# Altium PCB KUOZHAN.PCBDOC (part 18 of 21)
Units mm, origin at the board's own origin, x right, y up, seen from the top; angles counter-clockwise.
Board outline 165.51 x 116.38 mm, 2 copper layers (Top Layer, Bottom Layer); 171 components, 245 nets, 894 pads, 298 vias.
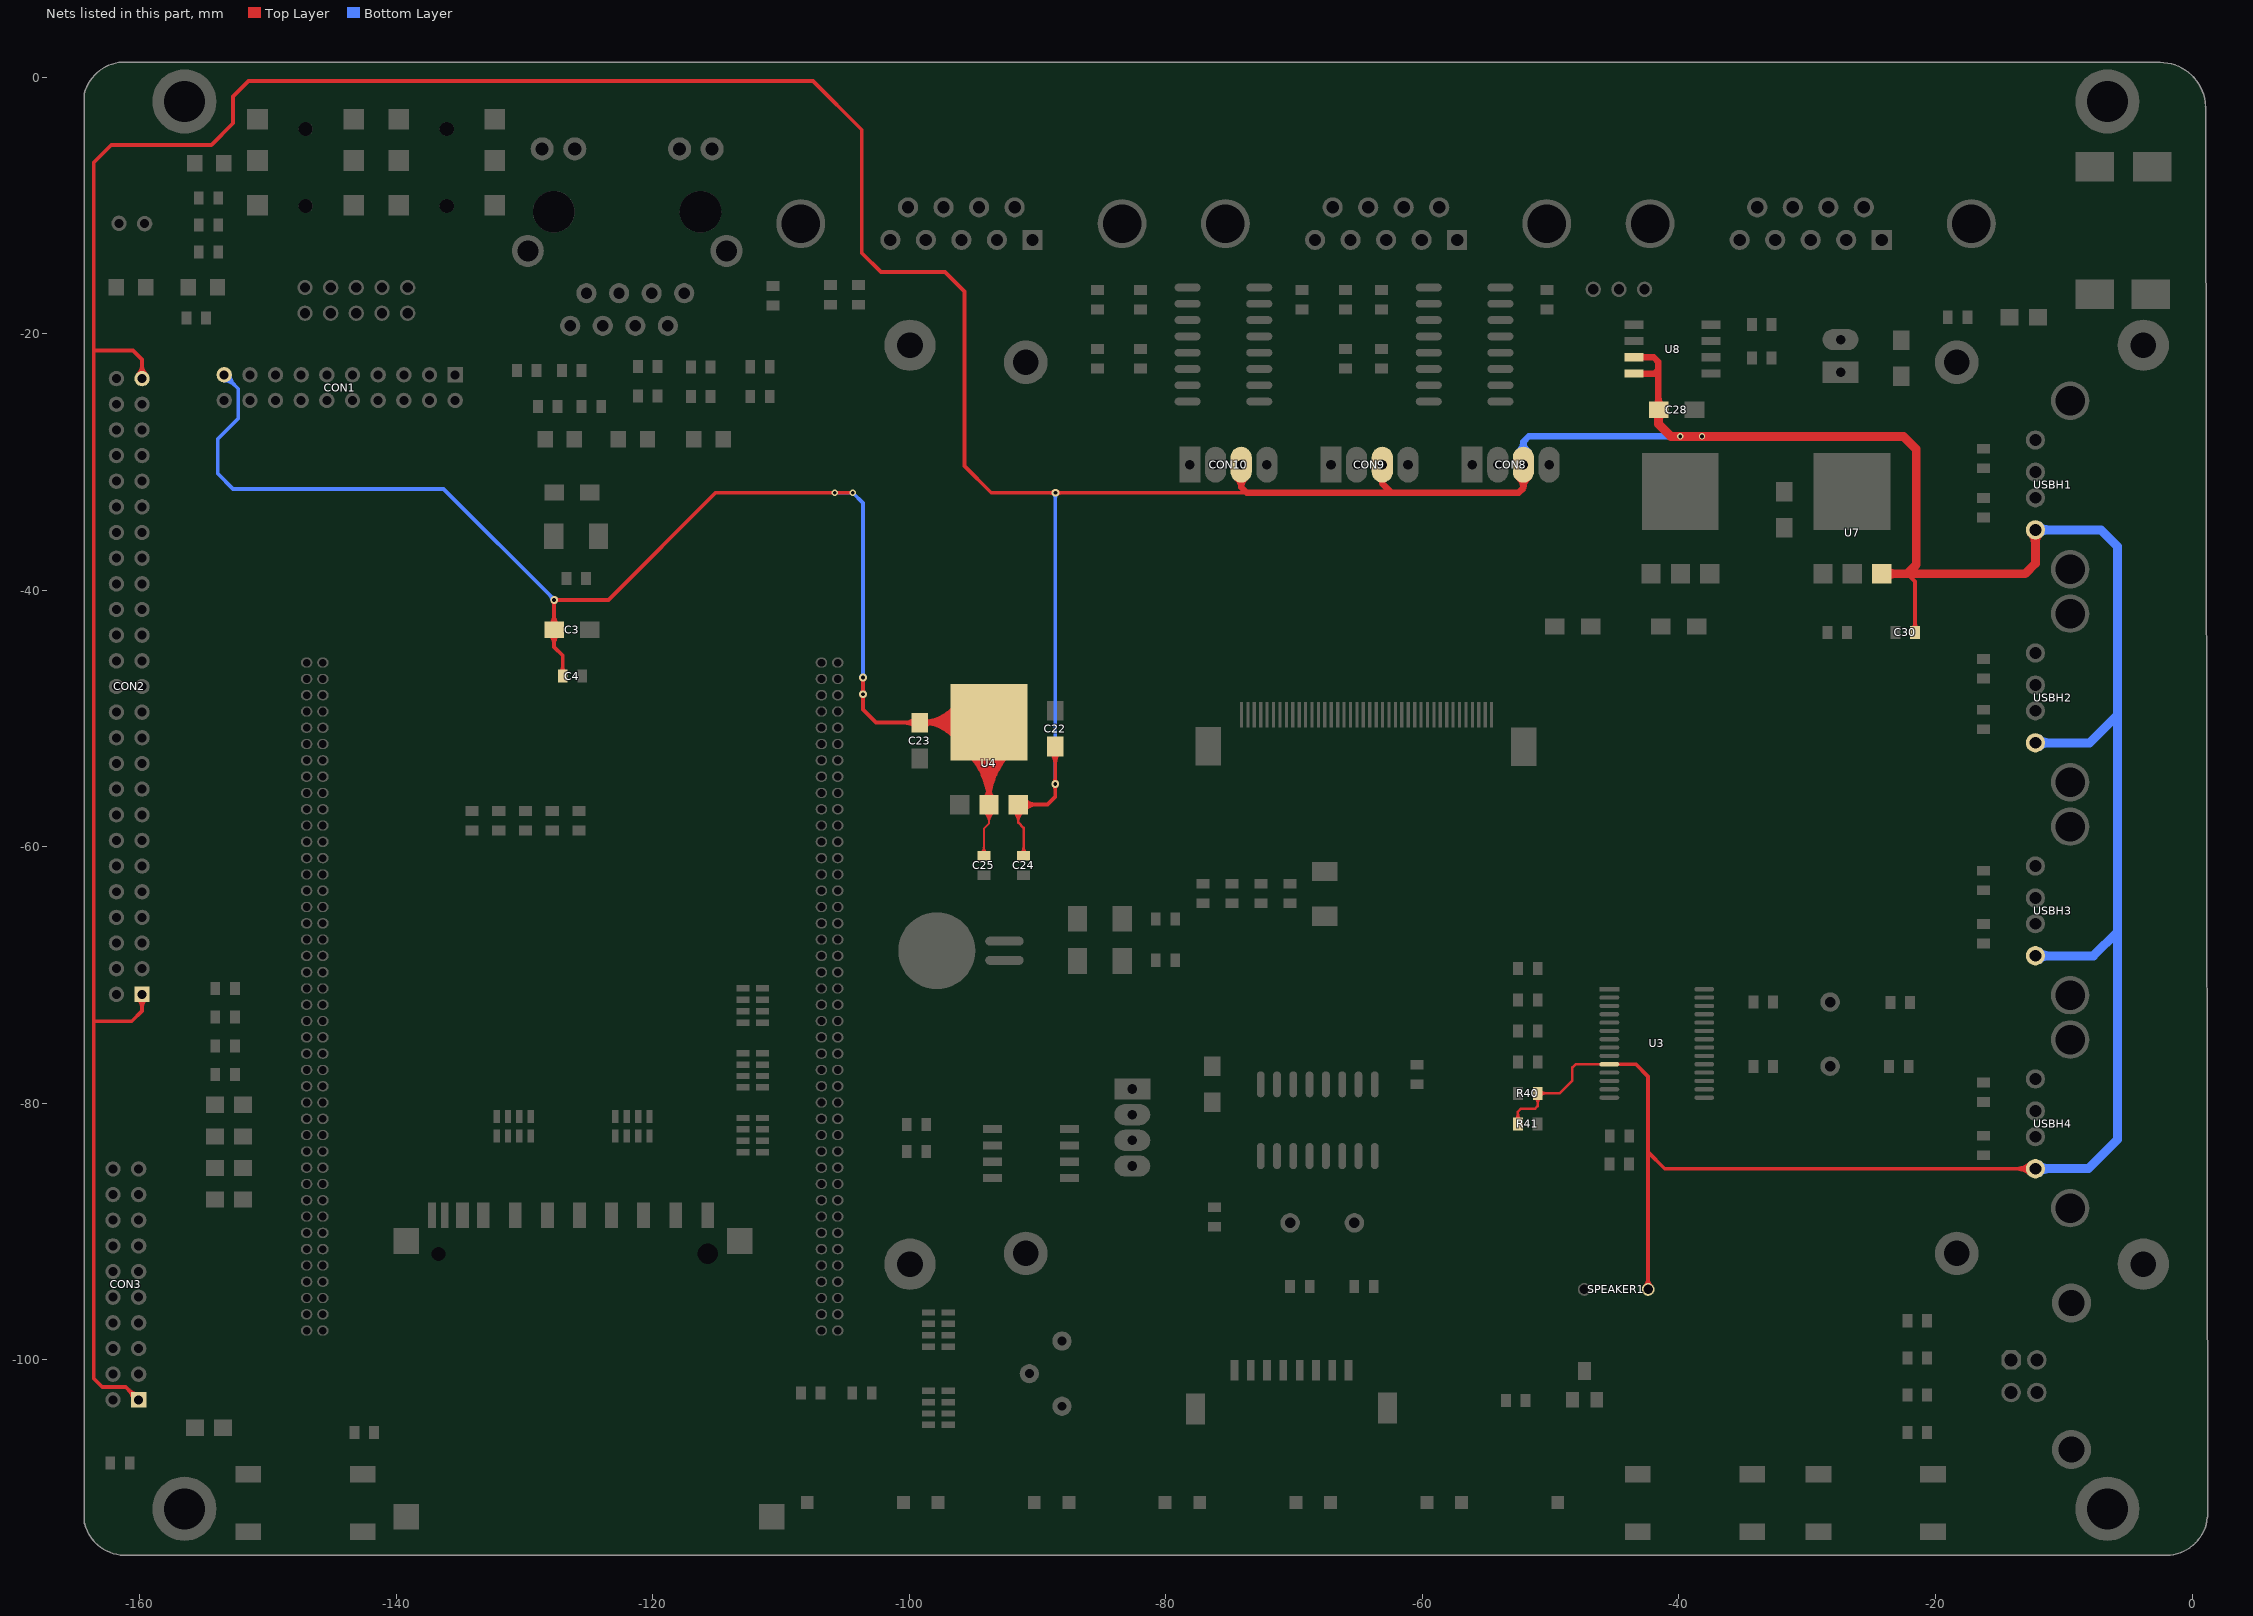
[diagram p18: the nets of this part, all layers, seen from the top]

## Via types
v1: diameter 0.5, hole 0.3, Top Layer to Bottom Layer, 272 vias
v2: diameter 0.6, hole 0.3, Top Layer to Bottom Layer, 24 vias
v3: diameter 0.9, hole 0.9, Top Layer to Bottom Layer, 2 vias

## Nets (pads, with @x,y where several pads share a name; then routed paths per layer and width w, separated by ;. In a path a pad name is that pad's centre, name@x,y a point inside that pad or via, vN(x,y) a via of type N, cw(c..) or ccw(c..) an arc to the next point about the centre after c; other vN are vias at no path point) (continued)
VDD5V: C22.1 C24.1 C28.1 C30.1 CON2.1 CON2.49 CON3.1 CON8.3 CON9.3 CON10.3 R40.2 R41.2 SPEAKER1.1 U3.10 U4.1 U7.1 U8.7 U8.8 USBH1.1 USBH2.1 USBH3.1 USBH4.1 | length 710.3
  Top Layer w0.2: U4.1@-91.497,-56.712 -91.497,-58.103 ; C24.1@-91.083,-60.69 -91.083,-58.517 -91.497,-58.103 ; R41.2@-52.549,-81.6 -52.549,-80.649 -52.3,-80.4 -51.2,-80.4 -51.013,-80.213 R40.2@-51.013,-79.212 -49.312,-79.212 -48.3,-78.2 -48.3,-77.2 -48.05,-76.95 U3.10@-45.35,-76.95 ; U4.1@-91.914,-57.211 cw(c-92.66,-58.103) -91.497,-58.103 ; U4.1@-91.914,-57.211 cw(c-92.66,-58.103) -91.497,-58.103 ; U4.1@-91.914,-57.211 cw(c-92.66,-58.103) -91.497,-58.103 ; U4.1@-91.914,-57.211 cw(c-92.66,-58.103) -91.497,-58.103 ; U4.1@-91.914,-57.211 cw(c-92.66,-58.103) -91.497,-58.103 ; U4.1@-91.786,-57.057 cw(c-92.302,-57.675) -91.497,-57.675 ; U4.1@-91.786,-57.057 cw(c-92.302,-57.675) -91.497,-57.675 ; U4.1@-91.786,-57.057 cw(c-92.302,-57.675) -91.497,-57.675 ; U4.1@-91.786,-57.057 cw(c-92.302,-57.675) -91.497,-57.675 ; U4.1@-91.786,-57.057 cw(c-92.302,-57.675) -91.497,-57.675 ; -91.497,-58.103 cw(c-90.333,-58.103) U4.1@-91.08,-57.211 ; -91.497,-58.103 cw(c-90.333,-58.103) U4.1@-91.08,-57.211 ; -91.497,-58.103 cw(c-90.333,-58.103) U4.1@-91.08,-57.211 ; -91.497,-58.103 cw(c-90.333,-58.103) U4.1@-91.08,-57.211 ; -91.497,-58.103 cw(c-90.333,-58.103) U4.1@-91.08,-57.211 ; -91.497,-57.675 cw(c-90.691,-57.675) U4.1@-91.208,-57.057 ; -91.497,-57.675 cw(c-90.691,-57.675) U4.1@-91.208,-57.057 ; -91.497,-57.675 cw(c-90.691,-57.675) U4.1@-91.208,-57.057 ; -91.497,-57.675 cw(c-90.691,-57.675) U4.1@-91.208,-57.057 ; -91.497,-57.675 cw(c-90.691,-57.675) U4.1@-91.208,-57.057 ; C24.1@-91.282,-60.491 ccw(c-91.762,-60.012) -91.083,-60.012 ; C24.1@-91.282,-60.491 ccw(c-91.762,-60.012) -91.083,-60.012 ; C24.1@-91.282,-60.491 ccw(c-91.762,-60.012) -91.083,-60.012 ; C24.1@-91.282,-60.491 ccw(c-91.762,-60.012) -91.083,-60.012 ; C24.1@-91.282,-60.491 ccw(c-91.762,-60.012) -91.083,-60.012 ; -91.083,-60.012 ccw(c-90.405,-60.012) C24.1@-90.885,-60.491 ; -91.083,-60.012 ccw(c-90.405,-60.012) C24.1@-90.885,-60.491 ; -91.083,-60.012 ccw(c-90.405,-60.012) C24.1@-90.885,-60.491 ; -91.083,-60.012 ccw(c-90.405,-60.012) C24.1@-90.885,-60.491 ; -91.083,-60.012 ccw(c-90.405,-60.012) C24.1@-90.885,-60.491 ; R41.2@-52.748,-81.274 ccw(c-53.228,-80.795) -52.549,-80.795 ; R41.2@-52.748,-81.274 ccw(c-53.228,-80.795) -52.549,-80.795 ; R41.2@-52.748,-81.274 ccw(c-53.228,-80.795) -52.549,-80.795 ; R41.2@-52.748,-81.274 ccw(c-53.228,-80.795) -52.549,-80.795 ; R41.2@-52.748,-81.274 ccw(c-53.228,-80.795) -52.549,-80.795 ; -52.549,-80.795 ccw(c-51.871,-80.795) R41.2@-52.351,-81.274 ; -52.549,-80.795 ccw(c-51.871,-80.795) R41.2@-52.351,-81.274 ; -52.549,-80.795 ccw(c-51.871,-80.795) R41.2@-52.351,-81.274 ; -52.549,-80.795 ccw(c-51.871,-80.795) R41.2@-52.351,-81.274 ; -52.549,-80.795 ccw(c-51.871,-80.795) R41.2@-52.351,-81.274 ; R40.2@-51.211,-79.538 cw(c-51.691,-80.018) -51.013,-80.018 ; R40.2@-51.211,-79.538 cw(c-51.691,-80.018) -51.013,-80.018 ; R40.2@-51.211,-79.538 cw(c-51.691,-80.018) -51.013,-80.018 ; R40.2@-51.211,-79.538 cw(c-51.691,-80.018) -51.013,-80.018 ; R40.2@-51.211,-79.538 cw(c-51.691,-80.018) -51.013,-80.018 ; -51.013,-80.018 cw(c-50.334,-80.018) R40.2@-50.814,-79.538 ; -51.013,-80.018 cw(c-50.334,-80.018) R40.2@-50.814,-79.538 ; -51.013,-80.018 cw(c-50.334,-80.018) R40.2@-50.814,-79.538 ; -51.013,-80.018 cw(c-50.334,-80.018) R40.2@-50.814,-79.538 ; -51.013,-80.018 cw(c-50.334,-80.018) R40.2@-50.814,-79.538 ; R40.2@-50.814,-79.411 cw(c-50.334,-79.891) -50.334,-79.212 ; R40.2@-50.814,-79.411 cw(c-50.334,-79.891) -50.334,-79.212 ; R40.2@-50.814,-79.411 cw(c-50.334,-79.891) -50.334,-79.212 ; R40.2@-50.814,-79.411 cw(c-50.334,-79.891) -50.334,-79.212 ; R40.2@-50.814,-79.411 cw(c-50.334,-79.891) -50.334,-79.212 ; R40.2@-50.814,-79.013 ccw(c-50.334,-78.534) -50.334,-79.212 ; R40.2@-50.814,-79.013 ccw(c-50.334,-78.534) -50.334,-79.212 ; R40.2@-50.814,-79.013 ccw(c-50.334,-78.534) -50.334,-79.212 ; R40.2@-50.814,-79.013 ccw(c-50.334,-78.534) -50.334,-79.212 ; R40.2@-50.814,-79.013 ccw(c-50.334,-78.534) -50.334,-79.212
  Top Layer w0.3: CON2.1@-160.118,-71.818 cw(c-160.886,-72.586) -159.8,-72.586 cw(c-158.714,-72.586) CON2.1@-159.482,-71.818 ; CON2.49@-160.118,-23.182 ccw(c-160.886,-22.414) -159.8,-22.414 ccw(c-158.714,-22.414) CON2.49@-159.482,-23.182 ; CON3.1@-160.067,-103.106 -161.074,-102.1 -162.9,-102.1 -163.567,-101.433 -163.567,-73.6 ; CON2.1@-159.8,-71.5 -159.8,-72.8 -160.6,-73.6 -163.567,-73.6 ; CON2.49@-159.8,-23.5 -159.8,-22 -160.5,-21.3 -163.567,-21.3 ; U4.1@-91.497,-56.712 -89.212,-56.712 -88.621,-56.121 v2(-88.621,-55.1) C22.1@-88.621,-52.18 ; -73.7,-32.4 v2(-88.6,-32.4) -93.6,-32.4 -95.7,-30.3 -95.7,-16.7 -97.2,-15.2 -102.2,-15.2 -103.7,-13.7 -103.7,-4.1 -107.5,-0.3 -151.5,-0.3 -152.7,-1.5 -152.7,-3.6 -154.4,-5.3 -162.2,-5.3 -163.567,-6.667 -163.567,-21.3 ; U3.10@-45.35,-76.95 -43.35,-76.95 -42.4,-77.9 -42.4,-83.8 ; SPEAKER1.1@-42.4,-94.5 -42.4,-83.8 ; -22.212,-38.712 -21.6,-39.324 C30.1@-21.6,-43.5 ; USBH4.1@-12.213,-85.091 -41.109,-85.091 -42.4,-83.8 ; -163.567,-73.6 -163.567,-21.3 ; -160.836,-102.338 cw(c-161.604,-103.106) CON3.1@-160.517,-103.106 ; -160.836,-102.338 ccw(c-160.067,-101.57) CON3.1@-160.067,-102.656 ; -160.836,-102.338 cw(c-161.604,-103.106) CON3.1@-160.517,-103.106 ; -160.836,-102.338 ccw(c-160.067,-101.57) CON3.1@-160.067,-102.656 ; -160.836,-102.338 cw(c-161.604,-103.106) CON3.1@-160.517,-103.106 ; -160.836,-102.338 ccw(c-160.067,-101.57) CON3.1@-160.067,-102.656 ; -160.836,-102.338 cw(c-161.604,-103.106) CON3.1@-160.517,-103.106 ; -160.836,-102.338 ccw(c-160.067,-101.57) CON3.1@-160.067,-102.656 ; -160.836,-102.338 ccw(c-160.067,-101.57) CON3.1@-160.067,-102.656 ; -160.836,-102.338 cw(c-161.604,-103.106) CON3.1@-160.517,-103.106 ; U4.1@-91.073,-57.136 cw(c-90.048,-58.161) -90.048,-56.712 ; U4.1@-91.073,-57.136 cw(c-90.048,-58.161) -90.048,-56.712 ; U4.1@-91.073,-57.136 cw(c-90.048,-58.161) -90.048,-56.712 ; U4.1@-91.073,-57.136 cw(c-90.048,-58.161) -90.048,-56.712 ; U4.1@-91.073,-57.136 cw(c-90.048,-58.161) -90.048,-56.712 ; U4.1@-91.073,-56.288 ccw(c-90.048,-55.263) -90.048,-56.712 ; U4.1@-91.073,-56.288 ccw(c-90.048,-55.263) -90.048,-56.712 ; U4.1@-91.073,-56.288 ccw(c-90.048,-55.263) -90.048,-56.712 ; U4.1@-91.073,-56.288 ccw(c-90.048,-55.263) -90.048,-56.712 ; U4.1@-91.073,-56.288 ccw(c-90.048,-55.263) -90.048,-56.712 ; C22.1@-88.964,-52.65 cw(c-89.792,-53.478) -88.621,-53.478 ; C22.1@-88.964,-52.65 cw(c-89.792,-53.478) -88.621,-53.478 ; C22.1@-88.964,-52.65 cw(c-89.792,-53.478) -88.621,-53.478 ; C22.1@-88.964,-52.65 cw(c-89.792,-53.478) -88.621,-53.478 ; C22.1@-88.964,-52.65 cw(c-89.792,-53.478) -88.621,-53.478 ; -88.962,-32.4 cw(c-88.962,-32.762) v2@-88.706,-32.506 ; -88.962,-32.4 ccw(c-88.962,-32.038) v2@-88.706,-32.294 ; -88.962,-32.4 cw(c-88.962,-32.762) v2@-88.706,-32.506 ; -88.962,-32.4 ccw(c-88.962,-32.038) v2@-88.706,-32.294 ; -88.962,-32.4 cw(c-88.962,-32.762) v2@-88.706,-32.506 ; -88.962,-32.4 ccw(c-88.962,-32.038) v2@-88.706,-32.294 ; -88.962,-32.4 cw(c-88.962,-32.762) v2@-88.706,-32.506 ; -88.962,-32.4 ccw(c-88.962,-32.038) v2@-88.706,-32.294 ; -88.962,-32.4 ccw(c-88.962,-32.038) v2@-88.706,-32.294 ; -88.962,-32.4 cw(c-88.962,-32.762) v2@-88.706,-32.506 ; v2@-88.727,-55.206 cw(c-88.983,-55.462) -88.621,-55.462 ; v2@-88.727,-55.206 cw(c-88.983,-55.462) -88.621,-55.462 ; v2@-88.727,-55.206 cw(c-88.983,-55.462) -88.621,-55.462 ; v2@-88.727,-55.206 cw(c-88.983,-55.462) -88.621,-55.462 ; v2@-88.727,-55.206 cw(c-88.983,-55.462) -88.621,-55.462 ; v2@-88.727,-54.994 ccw(c-88.983,-54.738) -88.621,-54.738 ; v2@-88.727,-54.994 ccw(c-88.983,-54.738) -88.621,-54.738 ; v2@-88.727,-54.994 ccw(c-88.983,-54.738) -88.621,-54.738 ; v2@-88.727,-54.994 ccw(c-88.983,-54.738) -88.621,-54.738 ; v2@-88.727,-54.994 ccw(c-88.983,-54.738) -88.621,-54.738 ; -88.621,-55.462 cw(c-88.259,-55.462) v2@-88.515,-55.206 ; -88.621,-55.462 cw(c-88.259,-55.462) v2@-88.515,-55.206 ; -88.621,-55.462 cw(c-88.259,-55.462) v2@-88.515,-55.206 ; -88.621,-55.462 cw(c-88.259,-55.462) v2@-88.515,-55.206 ; -88.621,-55.462 cw(c-88.259,-55.462) v2@-88.515,-55.206 ; -88.621,-54.738 ccw(c-88.259,-54.738) v2@-88.515,-54.994 ; -88.621,-54.738 ccw(c-88.259,-54.738) v2@-88.515,-54.994 ; -88.621,-54.738 ccw(c-88.259,-54.738) v2@-88.515,-54.994 ; -88.621,-54.738 ccw(c-88.259,-54.738) v2@-88.515,-54.994 ; -88.621,-54.738 ccw(c-88.259,-54.738) v2@-88.515,-54.994 ; -88.621,-53.478 cw(c-87.45,-53.478) C22.1@-88.278,-52.65 ; -88.621,-53.478 cw(c-87.45,-53.478) C22.1@-88.278,-52.65 ; -88.621,-53.478 cw(c-87.45,-53.478) C22.1@-88.278,-52.65 ; -88.621,-53.478 cw(c-87.45,-53.478) C22.1@-88.278,-52.65 ; -88.621,-53.478 cw(c-87.45,-53.478) C22.1@-88.278,-52.65 ; v2@-88.494,-32.506 cw(c-88.238,-32.762) -88.238,-32.4 ; v2@-88.494,-32.506 cw(c-88.238,-32.762) -88.238,-32.4 ; v2@-88.494,-32.506 cw(c-88.238,-32.762) -88.238,-32.4 ; v2@-88.494,-32.506 cw(c-88.238,-32.762) -88.238,-32.4 ; v2@-88.494,-32.506 cw(c-88.238,-32.762) -88.238,-32.4 ; v2@-88.494,-32.294 ccw(c-88.238,-32.038) -88.238,-32.4 ; v2@-88.494,-32.294 ccw(c-88.238,-32.038) -88.238,-32.4 ; v2@-88.494,-32.294 ccw(c-88.238,-32.038) -88.238,-32.4 ; v2@-88.494,-32.294 ccw(c-88.238,-32.038) -88.238,-32.4 ; v2@-88.494,-32.294 ccw(c-88.238,-32.038) -88.238,-32.4 ; SPEAKER1.1@-42.647,-94.253 ccw(c-43.245,-93.655) -42.4,-93.655 ; SPEAKER1.1@-42.647,-94.253 ccw(c-43.245,-93.655) -42.4,-93.655 ; SPEAKER1.1@-42.647,-94.253 ccw(c-43.245,-93.655) -42.4,-93.655 ; SPEAKER1.1@-42.647,-94.253 ccw(c-43.245,-93.655) -42.4,-93.655 ; SPEAKER1.1@-42.647,-94.253 ccw(c-43.245,-93.655) -42.4,-93.655 ; -42.4,-93.655 ccw(c-41.555,-93.655) SPEAKER1.1@-42.153,-94.253 ; -42.4,-93.655 ccw(c-41.555,-93.655) SPEAKER1.1@-42.153,-94.253 ; -42.4,-93.655 ccw(c-41.555,-93.655) SPEAKER1.1@-42.153,-94.253 ; -42.4,-93.655 ccw(c-41.555,-93.655) SPEAKER1.1@-42.153,-94.253 ; -42.4,-93.655 ccw(c-41.555,-93.655) SPEAKER1.1@-42.153,-94.253 ; C30.1@-21.753,-42.989 ccw(c-22.124,-42.618) -21.6,-42.618 ; C30.1@-21.753,-42.989 ccw(c-22.124,-42.618) -21.6,-42.618 ; C30.1@-21.753,-42.989 ccw(c-22.124,-42.618) -21.6,-42.618 ; C30.1@-21.753,-42.989 ccw(c-22.124,-42.618) -21.6,-42.618 ; C30.1@-21.753,-42.989 ccw(c-22.124,-42.618) -21.6,-42.618 ; -21.6,-42.571 ccw(c-21.009,-42.571) C30.1@-21.427,-42.989 ; -21.6,-42.571 ccw(c-21.009,-42.571) C30.1@-21.427,-42.989 ; -21.6,-42.571 ccw(c-21.009,-42.571) C30.1@-21.427,-42.989 ; -21.6,-42.571 ccw(c-21.009,-42.571) C30.1@-21.427,-42.989 ; -21.6,-42.571 ccw(c-21.009,-42.571) C30.1@-21.427,-42.989 ; -13.662,-85.091 cw(c-13.662,-86.54) USBH4.1@-12.638,-85.515 ; -13.662,-85.091 ccw(c-13.662,-83.643) USBH4.1@-12.638,-84.667 ; -13.662,-85.091 cw(c-13.662,-86.54) USBH4.1@-12.638,-85.515 ; -13.662,-85.091 ccw(c-13.662,-83.643) USBH4.1@-12.638,-84.667 ; -13.662,-85.091 cw(c-13.662,-86.54) USBH4.1@-12.638,-85.515 ; -13.662,-85.091 ccw(c-13.662,-83.643) USBH4.1@-12.638,-84.667 ; -13.662,-85.091 cw(c-13.662,-86.54) USBH4.1@-12.638,-85.515 ; -13.662,-85.091 ccw(c-13.662,-83.643) USBH4.1@-12.638,-84.667 ; -13.662,-85.091 ccw(c-13.662,-83.643) USBH4.1@-12.638,-84.667 ; -13.662,-85.091 cw(c-13.662,-86.54) USBH4.1@-12.638,-85.515
  Top Layer w0.5: CON10.3@-74.122,-30.21 -74.122,-31.978 ; CON9.3@-63.122,-30.21 -63.122,-31.678 -62.4,-32.4 ; CON8.3@-52.122,-30.21 -52.122,-32.022 ; U8.8@-43.498,-23.112 -41.912,-23.112 -41.6,-22.8 ; U8.7@-43.498,-21.842 -41.958,-21.842 -41.6,-22.2 -41.6,-22.8 ; C28.1@-41.6,-25.921 -41.6,-22.8 ; -22.212,-38.712 -20.112,-38.712 ; CON10.3@-74.48,-31.234 cw(c-75.073,-31.978) -74.122,-31.978 ; CON10.3@-74.48,-31.234 cw(c-75.073,-31.978) -74.122,-31.978 ; CON10.3@-74.48,-31.234 cw(c-75.073,-31.978) -74.122,-31.978 ; CON10.3@-74.48,-31.234 cw(c-75.073,-31.978) -74.122,-31.978 ; CON10.3@-74.48,-31.234 cw(c-75.073,-31.978) -74.122,-31.978 ; -74.122,-31.978 cw(c-73.171,-31.978) CON10.3@-73.763,-31.234 ; -74.122,-31.978 cw(c-73.171,-31.978) CON10.3@-73.763,-31.234 ; -74.122,-31.978 cw(c-73.171,-31.978) CON10.3@-73.763,-31.234 ; -74.122,-31.978 cw(c-73.171,-31.978) CON10.3@-73.763,-31.234 ; -74.122,-31.978 cw(c-73.171,-31.978) CON10.3@-73.763,-31.234 ; -74.122,-31.978 -73.7,-32.4 -62.4,-32.4 ; -62.4,-32.4 -52.5,-32.4 -52.122,-32.022 ; CON8.3@-52.493,-31.224 cw(c-53.165,-32.022) -52.122,-32.022 ; CON8.3@-52.493,-31.224 cw(c-53.165,-32.022) -52.122,-32.022 ; CON8.3@-52.493,-31.224 cw(c-53.165,-32.022) -52.122,-32.022 ; CON8.3@-52.493,-31.224 cw(c-53.165,-32.022) -52.122,-32.022 ; CON8.3@-52.493,-31.224 cw(c-53.165,-32.022) -52.122,-32.022 ; -52.122,-32.022 cw(c-51.079,-32.022) CON8.3@-51.751,-31.224 ; -52.122,-32.022 cw(c-51.079,-32.022) CON8.3@-51.751,-31.224 ; -52.122,-32.022 cw(c-51.079,-32.022) CON8.3@-51.751,-31.224 ; -52.122,-32.022 cw(c-51.079,-32.022) CON8.3@-51.751,-31.224 ; -52.122,-32.022 cw(c-51.079,-32.022) CON8.3@-51.751,-31.224 ; C28.1@-41.852,-26.193 cw(c-42.509,-26.85) -41.58,-26.85 ; C28.1@-41.852,-26.193 cw(c-42.509,-26.85) -41.58,-26.85 ; C28.1@-41.852,-26.193 cw(c-42.509,-26.85) -41.58,-26.85 ; C28.1@-41.852,-25.649 ccw(c-42.46,-25.041) -41.6,-25.041 ; C28.1@-41.852,-25.649 ccw(c-42.46,-25.041) -41.6,-25.041 ; C28.1@-41.852,-25.649 ccw(c-42.46,-25.041) -41.6,-25.041 ; C28.1@-41.852,-25.649 ccw(c-42.46,-25.041) -41.6,-25.041 ; C28.1@-41.852,-25.649 ccw(c-42.46,-25.041) -41.6,-25.041 ; -41.6,-24.942 ccw(c-40.601,-24.942) C28.1@-41.307,-25.649 ; -41.6,-24.942 ccw(c-40.601,-24.942) C28.1@-41.307,-25.649 ; -41.6,-24.942 ccw(c-40.601,-24.942) C28.1@-41.307,-25.649 ; -41.6,-24.942 ccw(c-40.601,-24.942) C28.1@-41.307,-25.649 ; -41.6,-24.942 ccw(c-40.601,-24.942) C28.1@-41.307,-25.649 ; -41.58,-26.85 cw(c-40.65,-26.85) C28.1@-41.307,-26.193 ; -41.58,-26.85 cw(c-40.65,-26.85) C28.1@-41.307,-26.193 ; -41.58,-26.85 cw(c-40.65,-26.85) C28.1@-41.307,-26.193 ; U7.1@-23.843,-39.066 cw(c-22.99,-39.919) -22.99,-38.712 ; U7.1@-23.843,-39.066 cw(c-22.99,-39.919) -22.99,-38.712 ; U7.1@-23.843,-39.066 cw(c-22.99,-39.919) -22.99,-38.712 ; U7.1@-23.843,-38.358 ccw(c-22.99,-37.505) -22.99,-38.712 ; U7.1@-23.843,-38.358 ccw(c-22.99,-37.505) -22.99,-38.712 ; U7.1@-23.843,-38.358 ccw(c-22.99,-37.505) -22.99,-38.712 ; USBH1.1@-12.567,-35.645 cw(c-13.421,-36.498) -12.213,-36.498 ; USBH1.1@-12.567,-35.645 cw(c-13.421,-36.498) -12.213,-36.498 ; USBH1.1@-12.567,-35.645 cw(c-13.421,-36.498) -12.213,-36.498 ; -12.213,-36.498 cw(c-11.006,-36.498) USBH1.1@-11.86,-35.645 ; -12.213,-36.498 cw(c-11.006,-36.498) USBH1.1@-11.86,-35.645 ; -12.213,-36.498 cw(c-11.006,-36.498) USBH1.1@-11.86,-35.645
  Top Layer w0.7: C28.1@-41.58,-25.921 -41.58,-27.041 -40.621,-28 v1(-39.9,-28) v1(-38.2,-28) -22.5,-28 -21.5,-29 -21.5,-38 -22.212,-38.712 ; U7.1@-24.197,-38.712 -22.212,-38.712 ; USBH1.1@-12.213,-35.291 -12.213,-37.913 -13.012,-38.712 -22.212,-38.712 ; -41.58,-26.609 cw(c-40.892,-26.609) -41.378,-26.122 ccw(c-40.892,-26.609) -41.58,-26.609 ; -41.58,-26.609 ccw(c-42.268,-26.609) -41.781,-26.122 cw(c-42.268,-26.609) -41.58,-26.609 ; -23.231,-38.712 cw(c-23.231,-37.746) -23.914,-38.429 ccw(c-23.231,-37.746) -23.231,-38.712 ; -23.231,-38.712 ccw(c-23.231,-39.678) -23.914,-38.995 cw(c-23.231,-39.678) -23.231,-38.712 ; -12.213,-36.257 cw(c-11.248,-36.257) -11.931,-35.574 ccw(c-11.248,-36.257) -12.213,-36.257 ; -12.213,-36.257 ccw(c-13.179,-36.257) -12.496,-35.574 cw(c-13.179,-36.257) -12.213,-36.257
  Bottom Layer w0.3: v2(-88.621,-55.1) v2@-88.621,-32.4 ; v2@-88.727,-54.994 ccw(c-88.983,-54.738) -88.621,-54.738 ; v2@-88.727,-54.994 ccw(c-88.983,-54.738) -88.621,-54.738 ; v2@-88.727,-54.994 ccw(c-88.983,-54.738) -88.621,-54.738 ; v2@-88.727,-54.994 ccw(c-88.983,-54.738) -88.621,-54.738 ; v2@-88.727,-54.994 ccw(c-88.983,-54.738) -88.621,-54.738 ; v2@-88.706,-32.506 cw(c-88.912,-32.712) -88.621,-32.712 ; v2@-88.706,-32.506 cw(c-88.912,-32.712) -88.621,-32.712 ; v2@-88.706,-32.506 cw(c-88.912,-32.712) -88.621,-32.712 ; v2@-88.706,-32.506 cw(c-88.912,-32.712) -88.621,-32.712 ; v2@-88.706,-32.506 cw(c-88.912,-32.712) -88.621,-32.712 ; -88.621,-54.738 ccw(c-88.259,-54.738) v2@-88.515,-54.994 ; -88.621,-54.738 ccw(c-88.259,-54.738) v2@-88.515,-54.994 ; -88.621,-54.738 ccw(c-88.259,-54.738) v2@-88.515,-54.994 ; -88.621,-54.738 ccw(c-88.259,-54.738) v2@-88.515,-54.994 ; -88.621,-54.738 ccw(c-88.259,-54.738) v2@-88.515,-54.994 ; -88.621,-32.813 cw(c-88.187,-32.813) v2@-88.494,-32.506 ; -88.621,-32.813 cw(c-88.187,-32.813) v2@-88.494,-32.506 ; -88.621,-32.813 cw(c-88.187,-32.813) v2@-88.494,-32.506 ; -88.621,-32.813 cw(c-88.187,-32.813) v2@-88.494,-32.506 ; -88.621,-32.813 cw(c-88.187,-32.813) v2@-88.494,-32.506
  Bottom Layer w0.5: CON8.3@-52.122,-30.21 -52.122,-28.422 ; v1(-38.2,-28) v1(-39.9,-28) -51.7,-28 -52.122,-28.422 ; CON8.3@-52.486,-29.189 ccw(c-53.113,-28.422) -52.122,-28.422 ; CON8.3@-52.486,-29.189 ccw(c-53.113,-28.422) -52.122,-28.422 ; CON8.3@-52.486,-29.189 ccw(c-53.113,-28.422) -52.122,-28.422 ; CON8.3@-52.486,-29.189 ccw(c-53.113,-28.422) -52.122,-28.422 ; CON8.3@-52.486,-29.189 ccw(c-53.113,-28.422) -52.122,-28.422 ; -52.122,-28.422 ccw(c-51.131,-28.422) CON8.3@-51.758,-29.189 ; -52.122,-28.422 ccw(c-51.131,-28.422) CON8.3@-51.758,-29.189 ; -52.122,-28.422 ccw(c-51.131,-28.422) CON8.3@-51.758,-29.189 ; -52.122,-28.422 ccw(c-51.131,-28.422) CON8.3@-51.758,-29.189 ; -52.122,-28.422 ccw(c-51.131,-28.422) CON8.3@-51.758,-29.189 ; USBH4.1@-11.86,-85.445 cw(c-11.006,-86.298) -11.006,-85.091 ; USBH4.1@-11.86,-85.445 cw(c-11.006,-86.298) -11.006,-85.091 ; USBH4.1@-11.86,-85.445 cw(c-11.006,-86.298) -11.006,-85.091 ; USBH4.1@-11.86,-84.738 ccw(c-11.006,-83.884) -11.006,-85.091 ; USBH4.1@-11.86,-84.738 ccw(c-11.006,-83.884) -11.006,-85.091 ; USBH4.1@-11.86,-84.738 ccw(c-11.006,-83.884) -11.006,-85.091 ; USBH3.1@-11.86,-68.845 cw(c-11.006,-69.698) -11.006,-68.491 ; USBH3.1@-11.86,-68.845 cw(c-11.006,-69.698) -11.006,-68.491 ; USBH3.1@-11.86,-68.845 cw(c-11.006,-69.698) -11.006,-68.491 ; USBH3.1@-11.86,-68.138 ccw(c-11.006,-67.284) -11.006,-68.491 ; USBH3.1@-11.86,-68.138 ccw(c-11.006,-67.284) -11.006,-68.491 ; USBH3.1@-11.86,-68.138 ccw(c-11.006,-67.284) -11.006,-68.491 ; USBH2.1@-11.86,-52.245 cw(c-11.006,-53.098) -11.006,-51.891 ; USBH2.1@-11.86,-52.245 cw(c-11.006,-53.098) -11.006,-51.891 ; USBH2.1@-11.86,-52.245 cw(c-11.006,-53.098) -11.006,-51.891 ; USBH2.1@-11.86,-51.538 ccw(c-11.006,-50.684) -11.006,-51.891 ; USBH2.1@-11.86,-51.538 ccw(c-11.006,-50.684) -11.006,-51.891 ; USBH2.1@-11.86,-51.538 ccw(c-11.006,-50.684) -11.006,-51.891 ; USBH1.1@-11.86,-35.645 cw(c-11.006,-36.498) -11.006,-35.291 ; USBH1.1@-11.86,-35.645 cw(c-11.006,-36.498) -11.006,-35.291 ; USBH1.1@-11.86,-35.645 cw(c-11.006,-36.498) -11.006,-35.291 ; USBH1.1@-11.86,-34.938 ccw(c-11.006,-34.084) -11.006,-35.291 ; USBH1.1@-11.86,-34.938 ccw(c-11.006,-34.084) -11.006,-35.291 ; USBH1.1@-11.86,-34.938 ccw(c-11.006,-34.084) -11.006,-35.291
  Bottom Layer w0.7: USBH4.1@-12.213,-85.091 -8.091,-85.091 -5.8,-82.8 -5.8,-66.6 ; USBH3.1@-12.213,-68.491 -7.691,-68.491 -5.8,-66.6 ; USBH2.1@-12.213,-51.891 -7.991,-51.891 -5.8,-49.7 ; USBH1.1@-12.213,-35.291 -7.109,-35.291 -5.8,-36.6 -5.8,-49.7 ; -11.248,-85.091 cw(c-11.248,-84.126) -11.931,-84.808 ccw(c-11.248,-84.126) -11.248,-85.091 ; -11.248,-85.091 ccw(c-11.248,-86.057) -11.931,-85.374 cw(c-11.248,-86.057) -11.248,-85.091 ; -11.248,-68.491 cw(c-11.248,-67.526) -11.931,-68.208 ccw(c-11.248,-67.526) -11.248,-68.491 ; -11.248,-68.491 ccw(c-11.248,-69.457) -11.931,-68.774 cw(c-11.248,-69.457) -11.248,-68.491 ; -11.248,-51.891 cw(c-11.248,-50.926) -11.931,-51.608 ccw(c-11.248,-50.926) -11.248,-51.891 ; -11.248,-51.891 ccw(c-11.248,-52.857) -11.931,-52.174 cw(c-11.248,-52.857) -11.248,-51.891 ; -11.248,-35.291 cw(c-11.248,-34.326) -11.931,-35.008 ccw(c-11.248,-34.326) -11.248,-35.291 ; -11.248,-35.291 ccw(c-11.248,-36.257) -11.931,-35.574 cw(c-11.248,-36.257) -11.248,-35.291 ; -5.8,-66.6 -5.8,-49.7
VDD18V: C3.1 C4.1 C23.1 C25.1 CON1.19 U4.3 U4.4 | length 584.4
  Top Layer w0.15: C25.1@-94.183,-60.69 -94.183,-58.583 -93.783,-58.183 ; U4.3@-93.783,-56.712 -93.783,-58.183 ; C25.1@-94.4,-60.474 ccw(c-94.922,-59.951) -94.183,-59.951 ; C25.1@-94.4,-60.474 ccw(c-94.922,-59.951) -94.183,-59.951 ; C25.1@-94.4,-60.474 ccw(c-94.922,-59.951) -94.183,-59.951 ; C25.1@-94.4,-60.474 ccw(c-94.922,-59.951) -94.183,-59.951 ; C25.1@-94.4,-60.474 ccw(c-94.922,-59.951) -94.183,-59.951 ; U4.3@-94.223,-57.224 cw(c-95.048,-58.183) -93.783,-58.183 ; U4.3@-94.223,-57.224 cw(c-95.048,-58.183) -93.783,-58.183 ; U4.3@-94.223,-57.224 cw(c-95.048,-58.183) -93.783,-58.183 ; U4.3@-94.223,-57.224 cw(c-95.048,-58.183) -93.783,-58.183 ; U4.3@-94.223,-57.224 cw(c-95.048,-58.183) -93.783,-58.183 ; -94.183,-59.951 ccw(c-93.445,-59.951) C25.1@-93.967,-60.474 ; -94.183,-59.951 ccw(c-93.445,-59.951) C25.1@-93.967,-60.474 ; -94.183,-59.951 ccw(c-93.445,-59.951) C25.1@-93.967,-60.474 ; -94.183,-59.951 ccw(c-93.445,-59.951) C25.1@-93.967,-60.474 ; -94.183,-59.951 ccw(c-93.445,-59.951) C25.1@-93.967,-60.474 ; U4.3@-94.125,-57.11 cw(c-94.767,-57.856) -93.783,-57.856 ; U4.3@-94.125,-57.11 cw(c-94.767,-57.856) -93.783,-57.856 ; U4.3@-94.125,-57.11 cw(c-94.767,-57.856) -93.783,-57.856 ; U4.3@-94.125,-57.11 cw(c-94.767,-57.856) -93.783,-57.856 ; U4.3@-94.125,-57.11 cw(c-94.767,-57.856) -93.783,-57.856 ; U4.3@-94.027,-56.996 cw(c-94.485,-57.529) -93.783,-57.529 ; U4.3@-94.027,-56.996 cw(c-94.485,-57.529) -93.783,-57.529 ; U4.3@-94.027,-56.996 cw(c-94.485,-57.529) -93.783,-57.529 ; U4.3@-94.027,-56.996 cw(c-94.485,-57.529) -93.783,-57.529 ; U4.3@-94.027,-56.996 cw(c-94.485,-57.529) -93.783,-57.529 ; -93.783,-58.183 cw(c-92.518,-58.183) U4.3@-93.343,-57.224 ; -93.783,-58.183 cw(c-92.518,-58.183) U4.3@-93.343,-57.224 ; -93.783,-58.183 cw(c-92.518,-58.183) U4.3@-93.343,-57.224 ; -93.783,-58.183 cw(c-92.518,-58.183) U4.3@-93.343,-57.224 ; -93.783,-58.183 cw(c-92.518,-58.183) U4.3@-93.343,-57.224 ; -93.783,-57.856 cw(c-92.799,-57.856) U4.3@-93.44,-57.11 ; -93.783,-57.856 cw(c-92.799,-57.856) U4.3@-93.44,-57.11 ; -93.783,-57.856 cw(c-92.799,-57.856) U4.3@-93.44,-57.11 ; -93.783,-57.856 cw(c-92.799,-57.856) U4.3@-93.44,-57.11 ; -93.783,-57.856 cw(c-92.799,-57.856) U4.3@-93.44,-57.11 ; -93.783,-57.529 cw(c-93.08,-57.529) U4.3@-93.538,-56.996 ; -93.783,-57.529 cw(c-93.08,-57.529) U4.3@-93.538,-56.996 ; -93.783,-57.529 cw(c-93.08,-57.529) U4.3@-93.538,-56.996 ; -93.783,-57.529 cw(c-93.08,-57.529) U4.3@-93.538,-56.996 ; -93.783,-57.529 cw(c-93.08,-57.529) U4.3@-93.538,-56.996
  Top Layer w0.3: C4.1@-127.01,-46.683 -127.01,-45.09 -127.68,-44.42 C3.1@-127.68,-43.079 v2(-127.68,-40.753) -123.453,-40.753 -115.1,-32.4 v1(-105.8,-32.4) v1(-104.4,-32.4) ; v2@-103.6,-46.7 v2(-103.6,-46.8) v2(-103.6,-48.1) -103.6,-49.305 -102.585,-50.32 C23.1@-99.179,-50.32 C23.1@-99.146,-50.287 ; C3.1@-128.023,-43.422 cw(c-128.851,-44.25) -127.68,-44.25 ; C3.1@-128.023,-43.422 cw(c-128.851,-44.25) -127.68,-44.25 ; C3.1@-128.023,-43.422 cw(c-128.851,-44.25) -127.68,-44.25 ; C3.1@-128.023,-43.422 cw(c-128.851,-44.25) -127.68,-44.25 ; C3.1@-128.023,-43.422 cw(c-128.851,-44.25) -127.68,-44.25 ; C3.1@-128.023,-42.736 ccw(c-128.851,-41.908) -127.68,-41.908 ; C3.1@-128.023,-42.736 ccw(c-128.851,-41.908) -127.68,-41.908 ; C3.1@-128.023,-42.736 ccw(c-128.851,-41.908) -127.68,-41.908 ; C3.1@-128.023,-42.736 ccw(c-128.851,-41.908) -127.68,-41.908 ; C3.1@-128.023,-42.736 ccw(c-128.851,-41.908) -127.68,-41.908 ; v2@-127.786,-40.859 cw(c-128.042,-41.115) -127.68,-41.115 ; v2@-127.786,-40.859 cw(c-128.042,-41.115) -127.68,-41.115 ; v2@-127.786,-40.859 cw(c-128.042,-41.115) -127.68,-41.115 ; v2@-127.786,-40.859 cw(c-128.042,-41.115) -127.68,-41.115 ; v2@-127.786,-40.859 cw(c-128.042,-41.115) -127.68,-41.115 ; -127.68,-44.25 cw(c-126.509,-44.25) C3.1@-127.337,-43.422 ; -127.68,-44.25 cw(c-126.509,-44.25) C3.1@-127.337,-43.422 ; -127.68,-44.25 cw(c-126.509,-44.25) C3.1@-127.337,-43.422 ; -127.68,-44.25 cw(c-126.509,-44.25) C3.1@-127.337,-43.422 ; -127.68,-44.25 cw(c-126.509,-44.25) C3.1@-127.337,-43.422 ; -127.68,-41.908 ccw(c-126.509,-41.908) C3.1@-127.337,-42.736 ; -127.68,-41.908 ccw(c-126.509,-41.908) C3.1@-127.337,-42.736 ; -127.68,-41.908 ccw(c-126.509,-41.908) C3.1@-127.337,-42.736 ; -127.68,-41.908 ccw(c-126.509,-41.908) C3.1@-127.337,-42.736 ; -127.68,-41.908 ccw(c-126.509,-41.908) C3.1@-127.337,-42.736 ; -127.68,-41.115 cw(c-127.318,-41.115) v2@-127.574,-40.859 ; -127.68,-41.115 cw(c-127.318,-41.115) v2@-127.574,-40.859 ; -127.68,-41.115 cw(c-127.318,-41.115) v2@-127.574,-40.859 ; -127.68,-41.115 cw(c-127.318,-41.115) v2@-127.574,-40.859 ; -127.68,-41.115 cw(c-127.318,-41.115) v2@-127.574,-40.859 ; v2@-127.574,-40.859 cw(c-127.318,-41.115) -127.318,-40.753 ; v2@-127.574,-40.859 cw(c-127.318,-41.115) -127.318,-40.753 ; v2@-127.574,-40.859 cw(c-127.318,-41.115) -127.318,-40.753 ; v2@-127.574,-40.859 cw(c-127.318,-41.115) -127.318,-40.753 ; v2@-127.574,-40.859 cw(c-127.318,-41.115) -127.318,-40.753 ; v2@-127.574,-40.647 ccw(c-127.318,-40.391) -127.318,-40.753 ; v2@-127.574,-40.647 ccw(c-127.318,-40.391) -127.318,-40.753 ; v2@-127.574,-40.647 ccw(c-127.318,-40.391) -127.318,-40.753 ; v2@-127.574,-40.647 ccw(c-127.318,-40.391) -127.318,-40.753 ; v2@-127.574,-40.647 ccw(c-127.318,-40.391) -127.318,-40.753 ; C4.1@-127.173,-46.393 ccw(c-127.568,-45.999) -127.01,-45.999 ; C4.1@-127.173,-46.393 ccw(c-127.568,-45.999) -127.01,-45.999 ; C4.1@-127.173,-46.393 ccw(c-127.568,-45.999) -127.01,-45.999 ; C4.1@-127.173,-46.393 ccw(c-127.568,-45.999) -127.01,-45.999 ; C4.1@-127.173,-46.393 ccw(c-127.568,-45.999) -127.01,-45.999 ; -127.01,-45.999 ccw(c-126.452,-45.999) C4.1@-126.847,-46.393 ; -127.01,-45.999 ccw(c-126.452,-45.999) C4.1@-126.847,-46.393 ; -127.01,-45.999 ccw(c-126.452,-45.999) C4.1@-126.847,-46.393 ; -127.01,-45.999 ccw(c-126.452,-45.999) C4.1@-126.847,-46.393 ; -127.01,-45.999 ccw(c-126.452,-45.999) C4.1@-126.847,-46.393 ; v2@-103.706,-48.206 cw(c-103.962,-48.462) -103.6,-48.462 ; v2@-103.706,-48.206 cw(c-103.962,-48.462) -103.6,-48.462 ; v2@-103.706,-48.206 cw(c-103.962,-48.462) -103.6,-48.462 ; v2@-103.706,-48.206 cw(c-103.962,-48.462) -103.6,-48.462 ; v2@-103.706,-48.206 cw(c-103.962,-48.462) -103.6,-48.462 ; v2@-103.706,-47.994 ccw(c-103.962,-47.738) -103.6,-47.738 ; v2@-103.706,-47.994 ccw(c-103.962,-47.738) -103.6,-47.738 ; v2@-103.706,-47.994 ccw(c-103.962,-47.738) -103.6,-47.738 ; v2@-103.706,-47.994 ccw(c-103.962,-47.738) -103.6,-47.738 ; v2@-103.706,-47.994 ccw(c-103.962,-47.738) -103.6,-47.738 ; v2@-103.706,-46.906 cw(c-103.962,-47.162) -103.6,-47.162 ; v2@-103.706,-46.906 cw(c-103.962,-47.162) -103.6,-47.162 ; v2@-103.706,-46.906 cw(c-103.962,-47.162) -103.6,-47.162 ; v2@-103.706,-46.906 cw(c-103.962,-47.162) -103.6,-47.162 ; v2@-103.706,-46.906 cw(c-103.962,-47.162) -103.6,-47.162 ; -103.6,-48.462 cw(c-103.238,-48.462) v2@-103.494,-48.206 ; -103.6,-48.462 cw(c-103.238,-48.462) v2@-103.494,-48.206 ; -103.6,-48.462 cw(c-103.238,-48.462) v2@-103.494,-48.206 ; -103.6,-48.462 cw(c-103.238,-48.462) v2@-103.494,-48.206 ; -103.6,-48.462 cw(c-103.238,-48.462) v2@-103.494,-48.206 ; -103.6,-47.738 ccw(c-103.238,-47.738) v2@-103.494,-47.994 ; -103.6,-47.738 ccw(c-103.238,-47.738) v2@-103.494,-47.994 ; -103.6,-47.738 ccw(c-103.238,-47.738) v2@-103.494,-47.994 ; -103.6,-47.738 ccw(c-103.238,-47.738) v2@-103.494,-47.994 ; -103.6,-47.738 ccw(c-103.238,-47.738) v2@-103.494,-47.994 ; -103.6,-47.162 cw(c-103.238,-47.162) v2@-103.494,-46.906 ; -103.6,-47.162 cw(c-103.238,-47.162) v2@-103.494,-46.906 ; -103.6,-47.162 cw(c-103.238,-47.162) v2@-103.494,-46.906 ; -103.6,-47.162 cw(c-103.238,-47.162) v2@-103.494,-46.906 ; -103.6,-47.162 cw(c-103.238,-47.162) v2@-103.494,-46.906 ; -100.35,-50.32 cw(c-100.35,-51.491) C23.1@-99.522,-50.663 ; -100.35,-50.32 ccw(c-100.35,-49.149) C23.1@-99.522,-49.977 ; -100.35,-50.32 cw(c-100.35,-51.491) C23.1@-99.522,-50.663 ; -100.35,-50.32 ccw(c-100.35,-49.149) C23.1@-99.522,-49.977 ; -100.35,-50.32 cw(c-100.35,-51.491) C23.1@-99.522,-50.663 ; -100.35,-50.32 ccw(c-100.35,-49.149) C23.1@-99.522,-49.977 ; -100.35,-50.32 cw(c-100.35,-51.491) C23.1@-99.522,-50.663 ; -100.35,-50.32 ccw(c-100.35,-49.149) C23.1@-99.522,-49.977 ; -100.35,-50.32 ccw(c-100.35,-49.149) C23.1@-99.522,-49.977 ; -100.35,-50.32 cw(c-100.35,-51.491) C23.1@-99.522,-50.663 ; C23.1@-99.145,-50.287 cw(c-99.145,-53.881) U4.4@-96.162,-51.877 ; C23.1@-99.145,-50.287 ccw(c-99.145,-46.693) U4.4@-96.162,-48.697 ; C23.1@-99.145,-50.287 cw(c-99.145,-53.881) U4.4@-96.162,-51.877 ; C23.1@-99.145,-50.287 ccw(c-99.145,-46.693) U4.4@-96.162,-48.697 ; C23.1@-99.145,-50.287 cw(c-99.145,-53.881) U4.4@-96.162,-51.877 ; C23.1@-99.145,-50.287 ccw(c-99.145,-46.693) U4.4@-96.162,-48.697 ; C23.1@-99.145,-50.287 cw(c-99.145,-53.881) U4.4@-96.162,-51.877 ; C23.1@-99.145,-50.287 ccw(c-99.145,-46.693) U4.4@-96.162,-48.697 ; C23.1@-99.145,-50.287 ccw(c-99.145,-46.693) U4.4@-96.162,-48.697 ; C23.1@-99.145,-50.287 cw(c-99.145,-53.881) U4.4@-96.162,-51.877 ; C23.1@-99.146,-50.287 U4.4@-93.797,-50.287 -93.783,-50.301 U4.3@-93.783,-56.712 ; C23.1@-98.836,-50.663 cw(c-97.928,-51.572) -97.928,-50.287 ; C23.1@-98.836,-50.663 cw(c-97.928,-51.572) -97.928,-50.287 ; C23.1@-98.836,-50.663 cw(c-97.928,-51.572) -97.928,-50.287 ; C23.1@-98.836,-50.663 cw(c-97.928,-51.572) -97.928,-50.287 ; C23.1@-98.836,-50.663 cw(c-97.928,-51.572) -97.928,-50.287 ; C23.1@-98.836,-49.977 ccw(c-98.089,-49.23) -98.089,-50.287 ; C23.1@-98.836,-49.977 ccw(c-98.089,-49.23) -98.089,-50.287 ; C23.1@-98.836,-49.977 ccw(c-98.089,-49.23) -98.089,-50.287 ; C23.1@-98.836,-49.977 ccw(c-98.089,-49.23) -98.089,-50.287 ; C23.1@-98.836,-49.977 ccw(c-98.089,-49.23) -98.089,-50.287 ; C23.1@-98.582,-50.287 cw(c-98.582,-53.503) U4.4@-95.913,-51.709 ; C23.1@-98.582,-50.287 ccw(c-98.582,-47.071) U4.4@-95.913,-48.865 ; C23.1@-98.582,-50.287 cw(c-98.582,-53.503) U4.4@-95.913,-51.709 ; C23.1@-98.582,-50.287 ccw(c-98.582,-47.071) U4.4@-95.913,-48.865 ; C23.1@-98.582,-50.287 cw(c-98.582,-53.503) U4.4@-95.913,-51.709 ; C23.1@-98.582,-50.287 ccw(c-98.582,-47.071) U4.4@-95.913,-48.865 ; C23.1@-98.582,-50.287 cw(c-98.582,-53.503) U4.4@-95.913,-51.709 ; C23.1@-98.582,-50.287 ccw(c-98.582,-47.071) U4.4@-95.913,-48.865 ; C23.1@-98.582,-50.287 ccw(c-98.582,-47.071) U4.4@-95.913,-48.865 ; C23.1@-98.582,-50.287 cw(c-98.582,-53.503) U4.4@-95.913,-51.709 ; -98.019,-50.287 cw(c-98.019,-53.124) U4.4@-95.664,-51.542 ; -98.019,-50.287 ccw(c-98.019,-47.45) U4.4@-95.664,-49.032 ; -98.019,-50.287 cw(c-98.019,-53.124) U4.4@-95.664,-51.542 ; -98.019,-50.287 ccw(c-98.019,-47.45) U4.4@-95.664,-49.032 ; -98.019,-50.287 cw(c-98.019,-53.124) U4.4@-95.664,-51.542 ; -98.019,-50.287 ccw(c-98.019,-47.45) U4.4@-95.664,-49.032 ; -98.019,-50.287 cw(c-98.019,-53.124) U4.4@-95.664,-51.542 ; -98.019,-50.287 ccw(c-98.019,-47.45) U4.4@-95.664,-49.032 ; -98.019,-50.287 ccw(c-98.019,-47.45) U4.4@-95.664,-49.032 ; -98.019,-50.287 cw(c-98.019,-53.124) U4.4@-95.664,-51.542 ; -97.456,-50.287 cw(c-97.456,-52.746) U4.4@-95.415,-51.375 ; -97.456,-50.287 ccw(c-97.456,-47.828) U4.4@-95.415,-49.199 ; -97.456,-50.287 cw(c-97.456,-52.746) U4.4@-95.415,-51.375 ; -97.456,-50.287 ccw(c-97.456,-47.828) U4.4@-95.415,-49.199 ; -97.456,-50.287 cw(c-97.456,-52.746) U4.4@-95.415,-51.375 ; -97.456,-50.287 ccw(c-97.456,-47.828) U4.4@-95.415,-49.199 ; -97.456,-50.287 cw(c-97.456,-52.746) U4.4@-95.415,-51.375 ; -97.456,-50.287 ccw(c-97.456,-47.828) U4.4@-95.415,-49.199 ; -97.456,-50.287 ccw(c-97.456,-47.828) U4.4@-95.415,-49.199 ; -97.456,-50.287 cw(c-97.456,-52.746) U4.4@-95.415,-51.375 ; -96.893,-50.287 cw(c-96.893,-52.368) U4.4@-95.166,-51.207 ; -96.893,-50.287 ccw(c-96.893,-48.206) U4.4@-95.166,-49.367 ; -96.893,-50.287 cw(c-96.893,-52.368) U4.4@-95.166,-51.207 ; -96.893,-50.287 ccw(c-96.893,-48.206) U4.4@-95.166,-49.367 ; -96.893,-50.287 cw(c-96.893,-52.368) U4.4@-95.166,-51.207 ; -96.893,-50.287 ccw(c-96.893,-48.206) U4.4@-95.166,-49.367 ; -96.893,-50.287 cw(c-96.893,-52.368) U4.4@-95.166,-51.207 ; -96.893,-50.287 ccw(c-96.893,-48.206) U4.4@-95.166,-49.367 ; -96.893,-50.287 ccw(c-96.893,-48.206) U4.4@-95.166,-49.367 ; -96.893,-50.287 cw(c-96.893,-52.368) U4.4@-95.166,-51.207 ; U4.4@-95.702,-52.407 cw(c-99.571,-56.712) U4.3@-93.783,-56.712 ; U4.4@-95.702,-52.407 cw(c-99.571,-56.712) U4.3@-93.783,-56.712 ; U4.4@-95.702,-52.407 cw(c-99.571,-56.712) U4.3@-93.783,-56.712 ; U4.4@-95.702,-52.407 cw(c-99.571,-56.712) U4.3@-93.783,-56.712 ; U4.4@-95.702,-52.407 cw(c-99.571,-56.712) U4.3@-93.783,-56.712 ; U4.4@-95.501,-52.184 cw(c-98.966,-56.039) U4.3@-93.783,-56.039 ; U4.4@-95.501,-52.184 cw(c-98.966,-56.039) U4.3@-93.783,-56.039 ; U4.4@-95.501,-52.184 cw(c-98.966,-56.039) U4.3@-93.783,-56.039 ; U4.4@-95.501,-52.184 cw(c-98.966,-56.039) U4.3@-93.783,-56.039 ; U4.4@-95.501,-52.184 cw(c-98.966,-56.039) U4.3@-93.783,-56.039 ; U4.4@-95.301,-51.96 cw(c-98.361,-55.366) -93.783,-55.366 ; U4.4@-95.301,-51.96 cw(c-98.361,-55.366) -93.783,-55.366 ; U4.4@-95.301,-51.96 cw(c-98.361,-55.366) -93.783,-55.366 ; U4.4@-95.301,-51.96 cw(c-98.361,-55.366) -93.783,-55.366 ; U4.4@-95.301,-51.96 cw(c-98.361,-55.366) -93.783,-55.366 ; U4.4@-95.1,-51.737 cw(c-97.756,-54.693) -93.783,-54.693 ; U4.4@-95.1,-51.737 cw(c-97.756,-54.693) -93.783,-54.693 ; U4.4@-95.1,-51.737 cw(c-97.756,-54.693) -93.783,-54.693 ; U4.4@-95.1,-51.737 cw(c-97.756,-54.693) -93.783,-54.693 ; U4.4@-95.1,-51.737 cw(c-97.756,-54.693) -93.783,-54.693 ; U4.4@-94.9,-51.514 cw(c-97.152,-54.02) -93.783,-54.02 ; U4.4@-94.9,-51.514 cw(c-97.152,-54.02) -93.783,-54.02 ; U4.4@-94.9,-51.514 cw(c-97.152,-54.02) -93.783,-54.02 ; U4.4@-94.9,-51.514 cw(c-97.152,-54.02) -93.783,-54.02 ; U4.4@-94.9,-51.514 cw(c-97.152,-54.02) -93.783,-54.02 ; U4.4@-94.699,-51.291 cw(c-96.547,-53.347) -93.783,-53.347 ; U4.4@-94.699,-51.291 cw(c-96.547,-53.347) -93.783,-53.347 ; U4.4@-94.699,-51.291 cw(c-96.547,-53.347) -93.783,-53.347 ; U4.4@-94.699,-51.291 cw(c-96.547,-53.347) -93.783,-53.347 ; U4.4@-94.699,-51.291 cw(c-96.547,-53.347) -93.783,-53.347 ; U4.3@-94.207,-56.288 ccw(c-95.231,-55.263) -93.783,-55.263 ; U4.3@-94.207,-56.288 ccw(c-95.231,-55.263) -93.783,-55.263 ; U4.3@-94.207,-56.288 ccw(c-95.231,-55.263) -93.783,-55.263 ; U4.3@-94.207,-56.288 ccw(c-95.231,-55.263) -93.783,-55.263 ; U4.3@-94.207,-56.288 ccw(c-95.231,-55.263) -93.783,-55.263 ; U4.3@-93.783,-56.712 cw(c-87.937,-56.712) U4.4@-91.876,-52.393 ; U4.3@-93.783,-56.712 cw(c-87.937,-56.712) U4.4@-91.876,-52.393 ; U4.3@-93.783,-56.712 cw(c-87.937,-56.712) U4.4@-91.876,-52.393 ; U4.3@-93.783,-56.712 cw(c-87.937,-56.712) U4.4@-91.876,-52.393 ; U4.3@-93.783,-56.712 cw(c-87.937,-56.712) U4.4@-91.876,-52.393 ; U4.3@-93.783,-56.032 cw(c-88.557,-56.032) U4.4@-92.078,-52.171 ; U4.3@-93.783,-56.032 cw(c-88.557,-56.032) U4.4@-92.078,-52.171 ; U4.3@-93.783,-56.032 cw(c-88.557,-56.032) U4.4@-92.078,-52.171 ; U4.3@-93.783,-56.032 cw(c-88.557,-56.032) U4.4@-92.078,-52.171 ; U4.3@-93.783,-56.032 cw(c-88.557,-56.032) U4.4@-92.078,-52.171 ; -93.783,-55.353 cw(c-89.177,-55.353) U4.4@-92.281,-51.949 ; -93.783,-55.353 cw(c-89.177,-55.353) U4.4@-92.281,-51.949 ; -93.783,-55.353 cw(c-89.177,-55.353) U4.4@-92.281,-51.949 ; -93.783,-55.353 cw(c-89.177,-55.353) U4.4@-92.281,-51.949 ; -93.783,-55.353 cw(c-89.177,-55.353) U4.4@-92.281,-51.949 ; -93.783,-55.263 ccw(c-92.334,-55.263) U4.3@-93.359,-56.288 ; -93.783,-55.263 ccw(c-92.334,-55.263) U4.3@-93.359,-56.288 ; -93.783,-55.263 ccw(c-92.334,-55.263) U4.3@-93.359,-56.288 ; -93.783,-55.263 ccw(c-92.334,-55.263) U4.3@-93.359,-56.288 ; -93.783,-55.263 ccw(c-92.334,-55.263) U4.3@-93.359,-56.288 ; -93.783,-54.673 cw(c-89.797,-54.673) U4.4@-92.483,-51.728 ; -93.783,-54.673 cw(c-89.797,-54.673) U4.4@-92.483,-51.728 ; -93.783,-54.673 cw(c-89.797,-54.673) U4.4@-92.483,-51.728 ; -93.783,-54.673 cw(c-89.797,-54.673) U4.4@-92.483,-51.728 ; -93.783,-54.673 cw(c-89.797,-54.673) U4.4@-92.483,-51.728 ; -93.783,-53.993 cw(c-90.417,-53.993) U4.4@-92.685,-51.506 ; -93.783,-53.993 cw(c-90.417,-53.993) U4.4@-92.685,-51.506 ; -93.783,-53.993 cw(c-90.417,-53.993) U4.4@-92.685,-51.506 ; -93.783,-53.993 cw(c-90.417,-53.993) U4.4@-92.685,-51.506 ; -93.783,-53.993 cw(c-90.417,-53.993) U4.4@-92.685,-51.506 ; -93.783,-53.314 cw(c-91.037,-53.314) U4.4@-92.887,-51.284 ; -93.783,-53.314 cw(c-91.037,-53.314) U4.4@-92.887,-51.284 ; -93.783,-53.314 cw(c-91.037,-53.314) U4.4@-92.887,-51.284 ; -93.783,-53.314 cw(c-91.037,-53.314) U4.4@-92.887,-51.284 ; -93.783,-53.314 cw(c-91.037,-53.314) U4.4@-92.887,-51.284
  Bottom Layer w0.3: CON1.19@-153.394,-23.203 -152.3,-24.296 -152.3,-26.6 -153.9,-28.2 -153.9,-30.9 -152.7,-32.1 -136.3,-32.1 v2@-127.663,-40.737 ; v1(-105.8,-32.4) v1(-104.4,-32.4) -103.6,-33.2 v2(-103.6,-46.8) v2(-103.6,-48.1) ; CON1.19@-153.394,-23.653 cw(c-153.394,-24.739) -152.625,-23.971 ; CON1.19@-153.394,-23.653 cw(c-153.394,-24.739) -152.625,-23.971 ; CON1.19@-153.394,-23.653 cw(c-153.394,-24.739) -152.625,-23.971 ; CON1.19@-153.394,-23.653 cw(c-153.394,-24.739) -152.625,-23.971 ; CON1.19@-153.394,-23.653 cw(c-153.394,-24.739) -152.625,-23.971 ; CON1.19@-152.944,-23.203 ccw(c-151.857,-23.203) -152.625,-23.971 ; CON1.19@-152.944,-23.203 ccw(c-151.857,-23.203) -152.625,-23.971 ; CON1.19@-152.944,-23.203 ccw(c-151.857,-23.203) -152.625,-23.971 ; CON1.19@-152.944,-23.203 ccw(c-151.857,-23.203) -152.625,-23.971 ; CON1.19@-152.944,-23.203 ccw(c-151.857,-23.203) -152.625,-23.971 ; -127.959,-40.441 cw(c-128.27,-40.753) v2@-127.83,-40.753 ; -127.959,-40.441 cw(c-128.27,-40.753) v2@-127.83,-40.753 ; -127.959,-40.441 cw(c-128.27,-40.753) v2@-127.83,-40.753 ; -127.959,-40.441 cw(c-128.27,-40.753) v2@-127.83,-40.753 ; -127.959,-40.441 cw(c-128.27,-40.753) v2@-127.83,-40.753 ; -127.88,-40.52 ccw(c-127.68,-40.319) v2@-127.68,-40.603 ; -127.88,-40.52 ccw(c-127.68,-40.319) v2@-127.68,-40.603 ; -127.88,-40.52 ccw(c-127.68,-40.319) v2@-127.68,-40.603 ; -127.88,-40.52 ccw(c-127.68,-40.319) v2@-127.68,-40.603 ; -127.88,-40.52 ccw(c-127.68,-40.319) v2@-127.68,-40.603 ; v2@-103.706,-47.994 ccw(c-103.962,-47.738) -103.6,-47.738 ; v2@-103.706,-47.994 ccw(c-103.962,-47.738) -103.6,-47.738 ; v2@-103.706,-47.994 ccw(c-103.962,-47.738) -103.6,-47.738 ; v2@-103.706,-47.994 ccw(c-103.962,-47.738) -103.6,-47.738 ; v2@-103.706,-47.994 ccw(c-103.962,-47.738) -103.6,-47.738 ; v2@-103.706,-46.906 cw(c-103.962,-47.162) -103.6,-47.162 ; v2@-103.706,-46.906 cw(c-103.962,-47.162) -103.6,-47.162 ; v2@-103.706,-46.906 cw(c-103.962,-47.162) -103.6,-47.162 ; v2@-103.706,-46.906 cw(c-103.962,-47.162) -103.6,-47.162 ; v2@-103.706,-46.906 cw(c-103.962,-47.162) -103.6,-47.162 ; v2@-103.706,-46.694 ccw(c-103.962,-46.438) -103.6,-46.438 ; v2@-103.706,-46.694 ccw(c-103.962,-46.438) -103.6,-46.438 ; v2@-103.706,-46.694 ccw(c-103.962,-46.438) -103.6,-46.438 ; v2@-103.706,-46.694 ccw(c-103.962,-46.438) -103.6,-46.438 ; v2@-103.706,-46.694 ccw(c-103.962,-46.438) -103.6,-46.438 ; -103.6,-47.738 ccw(c-103.238,-47.738) v2@-103.494,-47.994 ; -103.6,-47.738 ccw(c-103.238,-47.738) v2@-103.494,-47.994 ; -103.6,-47.738 ccw(c-103.238,-47.738) v2@-103.494,-47.994 ; -103.6,-47.738 ccw(c-103.238,-47.738) v2@-103.494,-47.994 ; -103.6,-47.738 ccw(c-103.238,-47.738) v2@-103.494,-47.994 ; -103.6,-47.162 cw(c-103.238,-47.162) v2@-103.494,-46.906 ; -103.6,-47.162 cw(c-103.238,-47.162) v2@-103.494,-46.906 ; -103.6,-47.162 cw(c-103.238,-47.162) v2@-103.494,-46.906 ; -103.6,-47.162 cw(c-103.238,-47.162) v2@-103.494,-46.906 ; -103.6,-47.162 cw(c-103.238,-47.162) v2@-103.494,-46.906 ; -103.6,-46.438 ccw(c-103.238,-46.438) v2@-103.494,-46.694 ; -103.6,-46.438 ccw(c-103.238,-46.438) v2@-103.494,-46.694 ; -103.6,-46.438 ccw(c-103.238,-46.438) v2@-103.494,-46.694 ; -103.6,-46.438 ccw(c-103.238,-46.438) v2@-103.494,-46.694 ; -103.6,-46.438 ccw(c-103.238,-46.438) v2@-103.494,-46.694

## Text inside footprints (layer, text, board x,y; h text height)
J1: Top Overlay "1" at -106.766,-44.288 h0.8 r90; Top Overlay "2" at -105.091,-44.388 h0.8 r90; Top Overlay "83" at -106.6,-100 h0.8 r90; Top Overlay "84" at -105.1,-100 h0.8 r90
J2: Top Overlay "84" at -145.3,-100.1 h0.8 r90; Top Overlay "83" at -146.7,-100.1 h0.8 r90; Top Overlay "2" at -145.223,-44.388 h0.8 r90; Top Overlay "1" at -146.898,-44.288 h0.8 r90
LAN1: Top Overlay "1" at -116.323,-13.945 h0.8 r180; Top Overlay "7" at -125.982,-14.277 h0.8 r180